# Allegro board test_fixture_3.brd

Outline 81.28 x 111.76 mm; copper layers: TOP, GROUND, MIDDLE, POWER, BOTTOM. Coordinates in mm from the lower left corner of the outline.
Outline path: rectangle 0,0 81.28,111.76

## Design rules (mm)
nets with their own width: min track width 0.178; nets V3_3 V5_5 VCC
nets with their own width: min track width 0.254; nets AGND

## Placement (name value [footprint] x y rotation side)
C1  0.1u  [CAP196]  67.31 94.61 0 top
C2  10u  [CAP196]  45.09 87.63 0 top
C3  0.1u  [CAP196]  25.4 92.46 0 top
C4  0.1u  [CAP196]  25.4 98.17 0 top
C5  0.1u  [CAP196]  38.73 87.63 0 top
C6  10u  [CAP196]  25.4 89.53 180 top
C7  0.1u  [CAP196]  32.38 87.63 0 top
C9  0.1u  [CAP196]  21.72 56.77 0 top
C10  0.1u  [CAP196]  28.19 56.77 0 top
C11  0.1u  [CAP196]  41.53 56.77 0 top
C12  0.1u  [CAP196]  34.8 56.77 0 top
C13  1n  [CAP196]  48.51 56.77 0 top
C14  0.1u  [CAP196]  62.36 56.77 0 top
C16  2u  [CAP196]  23.88 74.93 90 top
C17  0.1u  [CAP196]  55.5 56.77 0 top
C18  10u  [CAP196]  25.27 81.28 0 top
C22  0.47u  [CAP196]  67.82 85.34 0 top
C23  33u  [CAP196]  68.96 56.77 0 top
D1  LED  [CAP196]  12.32 73.66 0 top
D2  LED  [CAP196]  28.57 71.12 0 top
D3  LED  [CAP196]  34.8 70.48 0 top
J1  HEADER 32  [32_PINS_CIR_CONN_RIGHT_ANGLE]  74.93 19.68 90 top
J3  HEADER 32  [32_PINS_CIR_CONN_RIGHT_ANGLE]  16.51 19.05 90 top
J5  CON10A  [CONN10]  57.78 8.26 0 top
J6  CON2  [CAP196]  12.32 70.48 180 top
NOREF  -  [unnamed]  2.54 109.22 0 top
NOREF#2  -  [unnamed]  78.74 109.22 0 top
NOREF#3  -  [unnamed]  2.54 2.54 0 top
NOREF#4  -  [unnamed]  78.74 2.54 0 top
R1  100k  [RES400]  13.84 93.85 0 top
R2  1.26k  [RES400]  55.88 90.17 0 top
R3  100k  [RES400]  20.32 93.98 0 top
R4  22.17k  [RES400]  51.69 90.17 0 top
R5  11.1k  [RES400]  60.96 90.17 0 top
R6  1k  [RES400]  41.15 83.19 90 top
R7  1k  [RES400]  38.86 72.39 270 top
R8  10k  [RES400]  47.62 25.4 0 top
R9  10k  [RES400]  47.62 22.23 180 top
R10  10k  [RES400]  61.59 24.77 0 top
R11  10k  [RES400]  64.39 43.31 0 top
R12  1k  [RES400]  17.4 66.67 0 top
U1  LM124A  [DIP14_3]  31.11 93.73 90 top
U3  MAX3222  [DIP18_3]  40.39 53.21 270 top
U4  MC9S08QE128_64  [MC9S08QE128_V2]  11.43 30.48 0 top
U5  CAT24C02  [DIP8_3]  50.8 34.29 0 top
U6  max550acpa  [DIP8_3]  50.8 46.35 0 top
U7  LT323/TO220  [TO220AB]  18.03 81.28 270 top
U8  LM3940/TO220  [TO220AB]  51.44 85.72 90 top

## Library data of the parts
C1-C7 C14 C16-C18 C22 C23 = C: Tolerance: ***; User Part Number: ***
C9-C13 = CAP: Tolerance: ***; User Part Number: ***
D1-D3 = LED: Tolerance: ***; User Part Number: ***
J1 J3 = HEADER 32
J5 = CON10A: User Part Number: ***
J6 = CON2: Tolerance: ***; User Part Number: ***
R1-R7 R12 = R: Tolerance: ***; User Part Number: ***
R8-R11 = RESISTOR: Tolerance: ***; User Part Number: ***
U1 = LM124A: Tolerance: ***; User Part Number: ***
U3 = MAX3222_2: Tolerance: ***; User Part Number: ***
U4 = MC9S08QE128_11
U5 = CAT24C02_3: Tolerance: ***; User Part Number: ***
U6 = max550acpa_3: Tolerance: ***; User Part Number: ***
U7 = LT323/TO220_0
U8 = LM3940/TO220_0

## Footprints (pads in the part's own frame, mm; a bottom-side part is the same pattern mirrored in y, then rotated)
32_PINS_CIR_CONN_RIGHT_ANGLE
  round 1.016 hole 0.711: 1(4,6) 2(4,4) 3(6,6) 4(6,4) 5(8,6) 6(8,4) 7(10,6) 8(10,4) 9(12,6) 10(12,4) 11(14,6) 12(14,4) 13(16,6) 14(16,4) 15(18,6) 16(18,4) 17(20,6) 18(20,4) 19(22,6) 20(22,4) 21(24,6) 22(24,4) 23(26,6) 24(26,4) 25(28,6) 26(28,4) 27(30,6) 28(30,4) 29(32,6) 30(32,4) 31(34,6) 32(34,4)
CAP196
  round 1.524 hole 0.914: 1(0,0) 2(0,2.54)
CONN10
  round 1.524 hole 0.914: 1(0,0) 2(0,2.54) 3(2.54,0) 4(2.54,2.54) 5(5.08,0) 6(5.08,2.54) 7(7.62,0) 8(7.62,2.54) 9(10.16,0) 10(10.16,2.54)
DIP8_3
  rect 1.524x1.524 hole 0.914: 1(0,0)
  round 1.524 hole 0.914: 2(0,-2.54) 3(0,-5.08) 4(0,-7.62) 5(7.62,-7.62) 6(7.62,-5.08) 7(7.62,-2.54) 8(7.62,0)
DIP14_3
  rect 1.524x1.524 hole 0.914: 1(0,0)
  round 1.524 hole 0.914: 2(0,-2.54) 3(0,-5.08) 4(0,-7.62) 5(0,-10.16) 6(0,-12.7) 7(0,-15.24) 8(7.62,-15.24) 9(7.62,-12.7) 10(7.62,-10.16) 11(7.62,-7.62) 12(7.62,-5.08) 13(7.62,-2.54) 14(7.62,0)
DIP18_3
  rect 1.524x1.524 hole 0.914: 1(0,0)
  round 1.524 hole 0.914: 2(0,-2.54) 3(0,-5.08) 4(0,-7.62) 5(0,-10.16) 6(0,-12.7) 7(0,-15.24) 8(0,-17.78) 9(0,-20.32) 10(7.62,-20.32) 11(7.62,-17.78) 12(7.62,-15.24) 13(7.62,-12.7) 14(7.62,-10.16) 15(7.62,-7.62) 16(7.62,-5.08) 17(7.62,-2.54) 18(7.62,0)
MC9S08QE128_V2
  round 1.524 hole 1.067: 1(8.026,0) 2(10.033,0) 3(8.026,-2.007) 4(10.033,-2.007) 5(8.026,-4.013) 6(10.033,-4.013) 7(8.026,-6.02) 8(10.033,-6.02) 9(8.026,-8.026) 10(10.033,-8.026) 11(8.026,-10.033) 12(10.033,-10.033) 13(8.026,-12.04) 14(10.033,-12.04) 15(8.026,-14.046) 16(10.033,-14.046) 17(12.04,-20.066) 18(12.04,-18.059) 19(14.046,-20.066) 20(14.046,-18.059) 21(16.053,-20.066) 22(16.053,-18.059) 23(18.059,-20.066) 24(18.059,-18.059) 25(20.066,-20.066) 26(20.066,-18.059) 27(22.073,-20.066) 28(22.073,-18.059) 29(24.079,-20.066) 30(24.079,-18.059) 31(26.086,-20.066) 32(26.086,-18.059) 33(32.664,-14.046) 34(30.658,-14.046) 35(32.664,-12.04) 36(30.658,-12.04) 37(32.664,-10.033) 38(30.658,-10.033) 39(32.664,-8.026) 40(30.658,-8.026) 41(32.664,-6.02) 42(30.658,-6.02) 43(32.664,-4.013) 44(30.658,-4.013) 45(32.664,-2.007) 46(30.658,-2.007) 47(32.664,0) 48(30.658,0) 49(26.086,5.359) 50(26.086,3.353) 51(24.079,5.359) 52(24.079,3.353) 53(22.073,5.359) 54(22.073,3.353) 55(20.066,5.359) 56(20.066,3.353) 57(18.059,5.359) 58(18.059,3.353) 59(16.053,5.359) 60(16.053,3.353) 61(14.046,5.359) 62(14.046,3.353) 63(12.04,5.359) 64(12.04,3.353)
RES400
  round 1.651 hole 1.067: 1(0,0) 2(0,10.16)
TO220AB
  round 2.032 hole 1.397: 1(0,0) 2(-2.54,0) 3(-5.08,0)
unnamed
  round 0.635 hole 3.175 unplated: (0,0)

## Nets
AGND: C1.1 C3.1 C4.1 C11.2 C12.2 C13.2 C14.1 C16.1 C17.1 C18.1 C22.1 C23.1 D1.2(CATHODE) D2.2(CATHODE) D3.2(CATHODE) J1.9 J1.10 J1.11 J6.2 R3.1 U1.11(V-) U3.16 U4.9(VREFL) U4.10(VSSAD) U4.11(VSS_2) U5.1(A0) U5.2(A1) U5.3(A2) U6.1(GND) U7.2 U8.2
V3_3: C13.1 C14.2 C17.2 C23.2 J1.6 J1.7 J1.8 R7.2 R8.1 R9.1 R10.2 R11.2 U3.1(E\N\) U3.17(VCC) U3.18(S\H\D\N\) U4.6(VDD) U4.7(VDDAD) U4.8(VREFH) U4.40(VDD_2) U5.8 U6.8(VDD) U8.3(OUT)
V5_5: C1.2 C18.2 C22.2 R1.2 R6.2 U1.4(V+) U7.3(VOUT) U8.1(IN)
VCC: C16.2 J6.1 R12.2 U7.1(VIN)
VIN: C6.1 J3.32
VSS: U5.4
ADP9: J3.21 U4.37(PTA7/TPM2CH2/ADP9)
MISO2: J3.6 J5.5 U4.46(PTD2/KBI2P2/MISO2)
MOSI1: J3.28 U4.59(PTE1/MOSI1) U6.4(DIN)
MOSI2: J1.1 J5.1 U4.1(PTD1/KBI2P1/MOSI2)
OUTA: U6.2(OUTA)
PTE4: J3.18 U4.39(PTE4)
R1IN: U3.14(R1IN)
R1OUT: U3.13(R1OUT) U4.34(PTB0/KBI1P4/RXD1/ADP4)
R2IN: U3.9(R2IN)
R2OUT: U3.10(R2OUT) U4.52(PTC6/RXD2/ACMP2+)
RXD1: J3.2
RXD2: J3.13
SPSCK1: J3.29 U4.60(PTE0/TPM2CLK/SPSCK1) U6.5(SCLK)
SPSCK2: J1.2 J5.3 U4.2(PTD0/KBI2P0/SPSCK2)
SS1_N: U6.3(CS_N)
SS2_N: J3.10 J5.9 U4.45(PTD3/KBI2P3/S\S\2\)
T1OUT: U3.15(T1OUT)
T2OUT: U3.8(T2OUT)
TXD1: J3.1 U3.12(T1IN) U4.33(PTB1/KBI1P5/TXD1/ADP5)
TXD2: J3.12 U3.11(T2IN) U4.51(PTC7/TXD2/ACMP2-)
VOUT: C2.2 J3.11 U4.50(PTA0/KBI1P0/TPM1CH0/ADP0/ACMP1)
N05337: J1.4 R11.1 U4.4(PTH6/SCL2) U5.6(SCL)
N15041: C9.1 U3.2(C1+)
N15045: C9.2 U3.4(C1-)
N15127: C10.1 U3.5(C2+)
N15131: C10.2 U3.6(C2-)
N15240: C11.1 U3.3(V+)
N15268: C12.1 U3.7(V-)
N18999: C3.2 R1.1 R3.2 U1.2(-)
N19124: C4.2 R2.2 U1.1(OUT) U1.3(+) U1.5(+)
N19488: C5.1 C7.1 R2.1 R5.1
N19578: C5.2 R4.2 U1.6(-)
N19618: C2.1 C7.2 R4.1 U1.7(OUT)
N19633: C6.2 R5.2
N22932: J1.5 U4.5(PTE7/TPM3CLK)
N24595: J3.14 U4.53(PTE3/S\S\1\)
N24653: J1.31 U4.54(PTE2/MISO1)
N25786: J1.12 U4.12(PTB7/SCL1/EXTAL)
N25790: J1.13 U4.13(PTB6/SDA1/XTAL)
N49174: J3.3 U4.35(PTF3/ADP13)
N49178: J3.4 U4.36(PTF2/ADP12)
N49182: J3.5 U4.44(PTD4/KBI2P4)
N49186: J3.7 R8.2 U4.47(PTA3/KBI1P3/SCL1/ADP3)
N49190: J3.8 R9.2 U4.48(PTA2/KBI1P2/SDA11/ADP2)
N51133: J1.3 R10.1 U4.3(PTH7/SDA2) U5.5(SDA)
N52935: J3.9 U4.49(PTA1/KBI1P1/TPM2CH0/ADP1/ACMP1)
N55207: J3.15 U4.55(PTG3/ADP19)
N55211: J3.16 U4.63(PTA5/IRQ/TPM1CLK/R\E\S\E\T\\)
N55215: J3.17 U4.64(PTA4/ACMP1O/BKGD/MS)
N55219: J3.19 U4.28(PTF6/ADP16)
N55223: J3.20 U4.29(PTF5/ADP15)
N55410: J3.23 U4.42(PTF1/ADP11)
N55414: J3.24 U4.43(PTF0/ADP10)
N55418: J3.25 U4.30(PTF4/ADP14)
N55422: J3.26 U4.31(PTB3/KBI1P7/MOSI1/ADP7)
N55426: J3.27 U4.32(PTB2/KBI1P6/SPSCK1/ADP6)
N55430: J3.30 U4.62(PTC4/TPM3CH4/R\S\T\O\)
N55434: J3.31 U4.61(PTC5/TPM3CH5/ACMP2O)
N55502: J1.14 U4.14(PTH1)
N55506: J1.15 U4.15(PTH0)
N55510: J1.16 U4.16(PTE6)
N55514: J1.17 U4.17(PTE5)
N55518: J1.18 U4.18(PTB5/TPM1CH1/SS1\)
N55522: J1.19 U4.19(PTB4/TPM2CH1/MISO1)
N55526: J1.20 U4.20(PTC3/TPM3CH3)
N55530: J1.21 U4.21(PTC2/TPM3CH2)
N55534: J1.22 U4.22(PTD7/KBI2P7)
N55538: J1.23 U4.23(PTD6/KBI2P6)
N55542: J1.24 U4.24(PTD5/KBI2P5)
N55546: J1.25 U4.25(PTC1/TPM3CH1)
N55550: J1.26 U4.26(PTC0/TPM3CH0)
N55554: J1.27 U4.27(PTF7/ADP17)
N55558: J1.28 U4.56(PTG2/ADP18)
N55562: J1.29 U4.57(PTG1)
N55566: J1.30 U4.58(PTG0)
N55570: J1.32 U4.38(PTA6/TPM1CH2/ADP8)
N78033: D1.1(ANODE) R12.1
N78056: D3.1(ANODE) R7.1
N78319: D2.1(ANODE) R6.1
N117653: J3.22 U4.41(VSS)

Pads without a net: J5 2 4 6 7 8 10; U1 8 9 10 12 13 14; U5 7; U6 6 7

## Via types
v1: diameter 0.61, hole 0.33, TOP to BOTTOM, 99 vias

## Routing (per net, layer and track width the routed paths; a pad name or vN(x,y) marks a point on that pad's centre or on a via; arc(x,y) is an arc through that point)
V5_5: length 121.6
  GROUND w0.178: 66.94,87.88 C22.2 ; C22.2 68.69,87.88 ; C22.2 67.82,87.01 ; C22.2 67.82,88.76 ; U7.3 18.03,87.36 ; U7.3 17.03,86.36 ; U7.3 18.03,85.36 ; U7.3 19.04,86.36 ; 51.44,84.72 U8.1 ; U8.1 50.43,85.72 ; U8.1 52.44,85.72 ; U8.1 51.44,86.73 ; U1.4 38.73,94.6 ; U1.4 39.61,93.73 ; U1.4 38.73,92.85 ; U1.4 37.86,93.73 ; R6.2 30.99,84.06 ; R6.2 31.86,83.19 ; R6.2 30.11,83.19 ; R6.2 30.99,82.31 ; C1.2 68.19,97.16 ; C1.2 66.43,97.16 ; C1.2 67.31,98.03 ; C1.2 67.31,96.28 ; 24.4,83.82 C18.2 ; C18.2 26.15,83.82 ; C18.2 25.27,82.94 ; C18.2 25.27,84.7 ; R1.2 13.84,104.89 ; R1.2 13.84,103.14 ; R1.2 12.97,104.01 ; R1.2 14.72,104.01
  POWER w0.178: R1.2 13.84,95.15 12.93,94.23 12.93,93.47 13.84,92.56 13.84,90.55 U7.3 22.73,86.36 C18.2 29.44,83.82 30.07,83.19 R6.2 30.99,85.98 31.72,86.72 32.76,86.72 33.3,87.25 33.3,88.29 U1.4 39.98,93.73 40.9,92.81 41.65,92.81 42.24,93.39 42.85,93.39 43.44,92.81 44.35,92.81 U8.1 65.66,85.72 C22.2 68.46,88.53 68.46,96 C1.2
VCC: length 27.9
  POWER w0.178: J6.1 17.4,75.56 R12.2 ; J6.1 11.44,70.48 ; J6.1 12.32,69.61 ; J6.1 12.32,71.36 ; J6.1 13.2,70.48 ; 17.03,81.28 U7.1 ; U7.1 19.04,81.28 ; U7.1 18.03,82.28 ; U7.1 18.03,78.38 17.4,77.75 R12.2 ; 20.46,74.93 C16.2 ; C16.2 22.21,74.93 ; C16.2 21.34,75.81 ; C16.2 19.43,76.83 R12.2 ; C16.2 21.34,74.05
VIN: length 54.8
  TOP w0.127: v1(8.64,56.64) 8.64,77.47 9.27,78.11 12.7,78.11 13.72,79.12 13.72,88.77 14.48,89.53 C6.1
  BOTTOM w0.127: J3.32 12.51,55.05 11.94,55.63 9.65,55.63 v1(8.64,56.64)
ADP9: length 88.8
  TOP w0.127: U4.37 45.85,18.69 45.85,6.73 45.09,5.97 12.95,5.97 6.86,12.06 6.86,39.4 J3.21
MISO2: length 63.4
  TOP w0.127: J3.6 18.69,27.05 19.06,27.42 19.85,27.42 20.51,26.76 20.51,26.07 21.07,25.51 21.86,25.51 23.39,27.05 40.66,27.05 U4.46 42.76,27.8 42.76,27.72 43.14,27.34 43.14,26.07 43.7,25.51 44.97,25.51 47.24,23.24 48.77,23.24 59.37,12.64 59.37,10.4 59.93,9.84 61.28,9.84 J5.5
MOSI1: length 46.1
  TOP w0.127: U6.4 29.21,38.73 27.48,37.01 U4.59 23.63,39.69 23.1,39.69 22.54,40.25 22.54,40.96 20,43.5 19.11,43.5 13.56,49.05 J3.28
PTE4: length 92.6
  TOP w0.127: J3.18 11.5,39.05 10.8,38.35 9.52,38.35 7.11,35.94 7.11,12.19 12.83,6.48 44.7,6.48 45.47,7.24 45.47,13.46 44.45,14.48 41.91,14.48 40.64,15.75 40.64,17.33 40.75,17.45 40.75,17.86 40.64,17.97 40.64,20.57 41.47,21.4 43.04,21.4 U4.39
R1OUT: length 63.4
  TOP w0.127: v1(39.88,19.18) 36.7,19.18 33.78,22.1 22.45,22.1 21.86,21.5 19.06,21.5 18.5,22.06 18.5,22.26 v1(15.37,25.4)
  BOTTOM w0.127: U4.34 40.21,16.43 39.88,16.76 39.88,17.33 39.76,17.45 39.76,17.86 39.88,17.97 v1(39.88,19.18) ; v1(15.37,25.4) 15.37,25.9 15.38,25.91 15.38,35.74 15,36.12 15,36.59 18.54,40.13 21.46,40.13 24,42.67 29.08,42.67 31.11,40.64
R2OUT: length 40.9
  TOP w0.127: v1(46.74,40.13) 46.74,41.02 45.47,42.29 25.15,42.29 23.5,40.64
  BOTTOM w0.127: U4.52 36.46,34.79 37.91,34.79 38.86,33.83 42.09,33.83 46.74,38.48 v1(46.74,40.13)
SPSCK1: length 61.6
  TOP w0.127: U6.5 58.42,37.21 58.04,36.83 46.1,36.83 43.1,33.83 38.86,33.83 37.91,32.88 33.11,32.88 32.45,33.54 32.45,34.23 31.89,34.79 28.44,34.79 U4.60 26.43,34.89 25.08,34.89 24.52,35.44 24.52,37.2 13.37,48.35 12.22,48.35 11.81,48.76 11.81,49.91 11.17,50.56 11,50.56 J3.29
SPSCK2: length 107.1
  TOP w0.127: U4.2 v1(33.53,30.48) ; v1(47.75,9.78) 50.29,9.78 51.18,10.67 v1(51.18,18.03) ; J5.3 60.96,8.26 62.23,6.99 69.47,6.99 69.85,7.37 69.85,20.07 67.56,22.35 67.56,23.5 68.58,24.51 70.1,24.51 J1.2
  BOTTOM w0.127: v1(33.53,30.48) 34.29,29.72 34.29,20.83 45.34,9.78 v1(47.75,9.78) ; J1.2 70.93,24.45 70.61,24.77 67.82,24.77 67.06,24 67.06,22.86 65.79,21.59 54.1,21.59 51.18,18.67 v1(51.18,18.03)
SS2_N: length 74.4
  TOP w0.127: v1(38.61,23.37) 21.9,23.37 21.86,23.41 19.06,23.41 19.02,23.37 18.41,23.37 15.88,25.91 12.57,25.91 11.56,26.92 11.56,29.34 12.51,30.29 J3.10 ; J5.9 66.36,9.84 65.01,9.84 64.45,10.4 64.45,11.67 49.15,26.97 49.1,26.97 47.6,28.47 U4.45
  BOTTOM w0.127: U4.45 43.04,27.42 43.04,26.07 42.48,25.51 41.25,25.51 39.1,23.37 v1(38.61,23.37)
TXD1: length 84.4
  TOP w0.127: v1(45.59,41.15) 44.7,42.04 29.97,42.04 28.57,40.64 ; J3.1 10.51,24.06 11.21,24.76 11.21,29.88 11.81,30.48 11.81,31.34 12.22,31.75 13.08,31.75 14.35,33.02 15.24,33.02 v1(21.21,38.99)
  BOTTOM w0.127: v1(21.21,38.99) 26.92,38.99 28.57,40.64 ; v1(45.59,41.15) 47.12,41.15 47.75,40.51 47.75,37.97 42.02,32.25 42.02,32.18 41.73,31.89 41.67,31.89 39.62,29.84 39.62,25.65 37.72,23.75 37.72,18.03 40.39,15.37 43.03,15.37 U4.33
TXD2: length 31.4
  TOP w0.127: J3.12 13.49,33.05 14.74,34.3 14.94,34.3 15.23,34.59 15.23,34.79 v1(19.94,39.5) ; 26.04,40.64 27.23,40.64 28.18,39.69 28.97,39.69 29.68,40.4 30.01,40.4 30.72,39.69 31.51,39.69 32.22,40.4 32.55,40.4 33.26,39.69 34.99,39.69 v1(35.05,39.62)
  BOTTOM w0.127: U4.51 35.51,39.17 v1(35.05,39.62) ; v1(19.94,39.5) 24.89,39.5 26.04,40.64
VOUT: length 137.8
  TOP w0.127: C2.2 47.5,90.17 50.74,86.93 51.93,86.93 52.64,86.22 52.64,85.03 56.77,80.9 68.45,80.9 75.56,73.79 75.56,57.91 71.63,53.98 71.63,53.4 71.22,52.99 70.64,52.99 69.63,51.98 69.63,51.4 69.22,50.99 60.26,50.99 v1(54.1,44.83) ; v1(43.94,33.02) v1(40.01,33.02) ; J3.11 11.52,33.05 12.22,33.75 12.92,33.75 v1(15.49,36.32)
  BOTTOM w0.127: v1(40.01,33.02) 38.33,33.02 U4.50 36.07,32.38 21.97,32.38 18.03,36.32 v1(15.49,36.32) ; v1(54.1,44.83) 48.9,44.83 48.39,44.32 48.39,37.97 43.94,33.53 v1(43.94,33.02)
N05337: length 63.4
  TOP w0.127: U5.6 58.42,30.4 59.37,31.36 59.37,32.14 58.66,32.86 58.66,33.18 59.37,33.9 59.37,35.24 61.59,37.47 ; U5.6 67.4,29.21 68.23,28.38 68.23,27.4 68.64,26.99 69.63,26.99 J1.4 ; U5.6 52.15,29.21 51.19,28.26 50.41,28.26 49.45,29.21 46.27,29.21 45.93,28.87 45.51,28.87 45.41,28.97 45.01,28.97 44.77,29.21 44.71,29.21 44.49,29.43 43.7,29.43 43.48,29.21 42.7,29.21 42.48,29.43 41.69,29.43 41.48,29.21 22.2,29.21 U4.4
N18999: length 32.8
  TOP w0.127: C3.2 24.26,93.85 21.63,93.85 20.74,92.96 19.9,92.96 19.01,93.85 R1.1 ; C3.2 20.32,100.08 R3.2 ; C3.2 32.38,95 U1.2
N19124: length 45.9
  TOP w0.127: R2.2 54.23,101.98 49.53,101.98 U1.5 40.01,92.46 34.92,92.46 ; 34.92,92.46 32.38,92.46 U1.1 ; 34.92,92.46 U1.3 34.67,95.25 29.97,95.25 26.92,98.3 26.92,99.19 C4.2
N19488: length 33
  TOP w0.127: 56.6,89.45 60.24,89.45 R5.1 ; 56.6,89.45 R2.1 ; 56.6,89.45 56.6,87.33 v1(55.88,86.61) ; C7.1 C5.1
  BOTTOM w0.127: v1(55.88,86.61) 52.25,86.61 51.93,86.93 50.94,86.93 50.62,86.61 39.75,86.61 C5.1
N19578: length 17.7
  TOP w0.127: C5.2 40.26,90.17 U1.6 43.81,94.68 47.82,98.68 50.04,98.68 R4.2
N19618: length 35.1
  TOP w0.127: C7.2 30.61,88.39 30.61,86.23 31.24,85.6 44.2,85.6 45.09,86.49 C2.1 45.09,88.82 44.13,89.78 44.13,90.56 45.09,91.52 45.09,92.46 U1.7 49.91,90.17 R4.1
N19633: length 43.6
  TOP w0.127: R5.2 59.94,100.33 59.69,100.58 57.57,100.58 56.3,99.31 55.24,99.31 52.96,101.6 51.05,101.6 48.9,99.44 47.75,99.44 42.23,93.92 42.23,93.28 40.51,91.57 29.97,91.57 25.4,87
N22932: length 107.8
  BOTTOM w0.127: J1.5 70.23,26.38 73.57,26.38 75.31,24.64 75.31,8.26 72.39,5.33 17.53,5.33 15.37,7.49 15.37,17.02 16.76,18.41 16.76,25.53 17.7,26.47 U4.5
N24595: length 23.1
  TOP w0.127: v1(17.14,37.72) 15.18,37.72 J3.14
  BOTTOM w0.127: U4.53 31.62,37.72 27.12,37.72 27,37.83 26.59,37.83 26.48,37.72 22.29,37.72 22.18,37.6 21.77,37.6 21.65,37.72 v1(17.14,37.72)
N24653: length 51.9
  TOP w0.127: U4.54 34.47,34.8 38.1,34.8 38.35,34.54 43.31,34.54 46.1,37.34 52.2,37.34 52.7,37.85 52.7,49.91 57.66,54.86 67.75,54.86 J1.31
N25786: length 93.7
  TOP w0.127: U4.12 20.51,19.49 18.99,19.49 v1(16.26,16.76)
  BOTTOM w0.127: J1.12 70.01,32.77 67.18,32.77 66.67,32.26 66.67,22.99 65.66,21.97 52.83,21.97 50.16,19.3 50.16,9.91 45.97,5.71 18.41,5.71 16.26,7.87 v1(16.26,16.76)
N25790: length 76.6
  TOP w0.127: v1(37.34,17.02) 35.92,18.44 35.27,18.44 35.26,18.43 34.85,18.43 34.83,18.44 22.81,18.44 21.86,17.49 20.41,17.49 U4.13
  BOTTOM w0.127: v1(37.34,17.02) 45.34,9.02 48.77,9.02 49.72,9.97 49.72,19.49 52.58,22.35 65.53,22.35 66.42,23.24 66.42,33.15 67.56,34.29 67.56,34.32 J1.13
N49174: length 64.5
  TOP w0.127: v1(44.83,13.08) 44.83,7.49 44.2,6.86 13.59,6.86 9.02,11.43 9.02,24.64 9.43,25.05 J3.3
  BOTTOM w0.127: v1(44.83,13.08) 44.83,14.73 45.34,15.24 45.34,17.2 U4.35
N49178: length 40.5
  TOP w0.127: v1(40.26,17.65) 39.24,17.65 36.7,15.11 15.24,15.11 14.86,15.49 14.86,17.02 16.26,18.41 16.26,20.29 12.51,24.04 J3.4
  BOTTOM w0.127: U4.36 41.3,17.65 v1(40.26,17.65)
N49182: length 56.8
  TOP w0.127: v1(24.26,22.73) 34.54,22.73 35.18,22.1 39.88,22.1 40.26,22.48 40.26,25.59 41.14,26.47 U4.44 ; v1(17.14,14.48) v1(10.54,14.48)
  BOTTOM w0.127: J3.5 8.76,25.3 8.76,14.99 9.27,14.48 v1(10.54,14.48) ; v1(24.26,22.73) 23.37,21.84 23.37,16.38 21.46,14.48 v1(17.14,14.48)
N49186: length 50.8
  TOP w0.127: v1(47.62,30.48) U4.47 ; R8.2 v1(47.62,33.15) ; v1(32.26,29.72) v1(40.51,29.72)
  BOTTOM w0.127: v1(32.26,29.72) 22.1,29.72 21.81,29.43 21.07,29.43 20.73,29.08 20.19,29.08 19.85,29.43 19.06,29.43 18.72,29.08 17.14,29.08 16.38,28.32 16.38,24.89 15.62,24.13 15.24,24.13 14.1,25.27 14.1,27.81 13.56,28.35 12.22,28.35 11.52,29.05 J3.7 ; v1(47.62,33.15) v1(47.62,30.48) ; v1(40.51,29.72) 41.5,29.72 41.69,29.53 42.48,29.53 42.67,29.72 43.33,29.72 U4.47
N49190: length 55.4
  TOP w0.127: J3.8 15.08,29.05 v1(15.88,29.84) ; v1(38.35,31.11) 38.99,30.48 U4.48
  BOTTOM w0.127: v1(15.88,29.84) 16.64,29.84 18.41,31.62 37.85,31.62 v1(38.35,31.11) ; 47.62,12.06 47.62,20.79 46.61,21.8 46.61,30.48 45.47,31.62 43.23,31.62 U4.48
N51133: length 70.2
  TOP w0.127: v1(21.97,38.1) 21.21,37.34 20.32,37.34 17.53,34.54 17.53,30.4 U4.3 ; v1(34.16,37.59) 45.34,37.59 45.85,38.1 v1(49.02,38.1) ; J1.3 64.04,25.69 63.96,25.77 63.55,25.77 63.47,25.69 63.4,25.69 63.37,25.65 62.48,25.65 R10.1 59.69,26.67 U5.5
  BOTTOM w0.127: v1(21.97,38.1) 33.66,38.1 v1(34.16,37.59) ; v1(49.02,38.1) 50.94,36.18 50.94,36.12 51.23,35.83 51.3,35.83 52.96,34.16 52.96,32.7 53.07,32.59 53.07,32.18 52.96,32.07 52.96,27.43 53.72,26.67 U5.5
N55211: length 17
  TOP w0.127: U4.63 24.42,34.89 24.42,33.06 24.13,32.77 22.86,32.77 21.72,33.91 v1(18.41,33.91)
  MIDDLE w0.127: v1(14.73,34.8) 17.53,34.8 v1(18.41,33.91)
  BOTTOM w0.127: v1(14.73,34.8) 14.73,34.83 J3.16
N55215: length 16.3
  TOP w0.127: J3.17 11.46,40.01 16.64,40.01 v1(18.16,38.48) ; U4.64 22.12,35.18 20.83,35.18 v1(20.19,35.81)
  MIDDLE w0.127: v1(20.19,35.81) 18.16,37.85 v1(18.16,38.48)
N55219: length 42.4
  TOP w0.127: v1(27.18,17.4) 27.69,17.4 v1(29.08,16) ; J3.19 11.52,41.05 12.22,40.35 12.8,40.35 13.5,41.05 14.96,41.05 v1(15.37,40.64)
  MIDDLE w0.127: v1(27.18,17.4) 27.18,26.29 15.37,38.1 v1(15.37,40.64) ; v1(32,14.35) 32.35,14 32.35,13.57 U4.28
  BOTTOM w0.127: v1(32,14.35) 30.35,16 v1(29.08,16)
N55223: length 59.7
  MIDDLE w0.127: U4.29 34.49,11.43 27.3,11.43 27.18,11.3 27.11,11.3 26.37,10.55 26.37,10.05 25.72,9.4 14.35,9.4 8.64,15.11 8.64,39.5 9.14,40.01 11.46,40.01 J3.20
N55410: length 54
  TOP w0.127: v1(25.02,24.51) 31.62,24.51 32.26,25.15 38.61,25.15 v1(39.37,24.38)
  MIDDLE w0.127: v1(25.02,24.51) 23.75,23.24 21.93,23.24 21.83,23.34 19.09,23.34 18.99,23.24 v1(15.49,23.24) ; U4.42 41.2,24.46 41.12,24.38 v1(39.37,24.38)
  BOTTOM w0.127: J3.23 9.4,43.94 9.4,28.45 10.1,27.75 10.8,27.75 11.21,27.34 11.21,26.64 12.1,25.75 12.8,25.75 13.21,25.34 13.21,24.64 14.61,23.24 v1(15.49,23.24)
N55414: length 46.5
  MIDDLE w0.127: J3.24 21.59,35.97 21.59,33.15 v1(26.42,28.32) ; v1(28.45,28.32) 29.34,27.43 36.07,27.43 37.48,28.84 41.2,28.84 41.72,29.36 v1(45.72,29.36)
  BOTTOM w0.127: v1(45.72,29.36) 45.72,28.09 U4.43 ; v1(26.42,28.32) v1(28.45,28.32)
N55418: length 75.6
  MIDDLE w0.127: v1(26.92,8) 13.97,8 7.75,14.22 7.75,44.29 J3.25
  BOTTOM w0.127: v1(26.92,8) 37.08,8 38.73,9.65 38.73,13.08 38.23,13.59 36.68,13.59 U4.30
N55422: length 67.5
  MIDDLE w0.127: v1(17.14,8.76) 14.48,8.76 8.26,14.99 8.26,42.8 9.4,43.94 9.4,43.94 9.89,44.43 10.77,44.43 11.13,44.79 11.13,45.67 J3.26
  BOTTOM w0.127: v1(17.14,8.76) 36.96,8.76 37.52,9.32 U4.31
N55426: length 76.8
  MIDDLE w0.127: J3.27 7.11,45.65 7.11,13.97 13.72,7.37 v1(25.65,7.37) ; U4.32 38.4,12.42 39.56,11.27 v1(39.56,10.41)
  BOTTOM w0.127: v1(25.65,7.37) 37.36,7.37 39.56,9.57 v1(39.56,10.41)
N55430: length 24.2
  MIDDLE w0.127: U4.62 26.54,34.9 26.54,36.32 24.89,37.97 24.26,37.97 14.48,47.75 14.48,49.7 13.13,51.05 J3.30
N55434: length 27.1
  TOP w0.127: v1(15.62,43.43) 15.62,44.83 15.37,45.09 13.46,45.09 13.21,45.34 12.8,45.75 12.8,45.75 12.22,46.33 12.22,46.35 9.53,49.05 9.53,52.07 J3.31
  MIDDLE w0.127: v1(15.62,43.43) 15.62,42.67 21.56,36.73 24.59,36.73 U4.61
N55502: length 76
  TOP w0.127: v1(35.05,18.92) 34.54,19.43 22.45,19.43 U4.14
  MIDDLE w0.127: v1(41.78,10.92) 50.42,10.92 59.05,19.56 71.88,19.56 72.9,20.57 72.9,33.72 J1.14
  BOTTOM w0.127: v1(35.05,18.92) 35.05,17.65 v1(41.78,10.92)
N55506: length 65.8
  TOP w0.127: v1(31.5,17.14) 29.72,15.37 27.55,15.37 27.29,15.62 v1(26.8,15.62) ; v1(62.48,31.24) 62.83,31.59 62.84,31.59 J1.15
  MIDDLE w0.127: v1(31.5,17.14) 31.88,17.53 31.88,18.16 39.07,25.35 44.46,25.35 44.54,25.27 46.49,25.27 47.26,24.51 55.5,24.51 55.88,24.89 59.05,24.89 v1(59.56,25.4) ; v1(26.8,15.62) 26.29,15.11 26.29,13.84 25.78,13.34 20.45,13.34 19.46,14.33 U4.15
  BOTTOM w0.127: v1(62.48,31.24) 62.48,28.32 v1(59.56,25.4)
N55510: length 68.3
  MIDDLE w0.127: v1(26.04,16.89) 23.11,16.89 22.66,16.43 U4.16 ; v1(32.89,16.43) 37.16,16.43 38.73,14.86 48.64,14.86 48.77,14.99 48.77,19.68 52.83,23.75 65.15,23.75 65.91,24.51 65.91,34.04 68.58,36.7 69.95,36.7 J1.16
  BOTTOM w0.127: v1(32.89,16.43) 29.35,16.43 29.29,16.5 28.88,16.5 28.81,16.43 26.49,16.43 v1(26.04,16.89)
N55514: length 80.9
  TOP w0.127: U4.17 22.48,10.41 21.97,10.92 21.97,13.97 v1(22.61,14.61) ; v1(34.16,17.78) 33.81,18.13 25.5,18.13 24.64,17.27 v1(24.64,15.88)
  MIDDLE w0.127: v1(50.29,22.73) 47.75,20.19 47.24,20.19 44.6,17.55 43.73,17.55 43.37,17.91 42.81,17.91 42.46,17.55 41.72,17.55 41.36,17.91 40.71,17.91 40.46,18.15 40.05,18.15 39.69,17.78 v1(34.16,17.78) ; v1(24.64,15.88) 23.88,15.88 v1(22.61,14.61)
  BOTTOM w0.127: J1.17 69.85,40.61 69.85,42.16 69.47,42.55 68.83,42.55 68.67,42.38 68.64,42.38 67.56,41.31 67.56,38.86 64.52,35.81 64.52,34.16 65.53,33.15 65.53,23.75 65.02,23.24 60.45,23.24 58.55,25.15 52.7,25.15 v1(50.29,22.73)
N55518: length 68.6
  TOP w0.127: U4.18 23.47,14.07 v1(24,14.61) ; v1(36.83,26.16) v1(32,26.16) ; v1(24.64,21.34) v1(32,21.34)
  MIDDLE w0.127: v1(37.47,27.94) 41.02,27.94 41.4,27.56 58.55,27.56 59.56,28.57 59.56,31.11 64.39,35.94 65.66,35.94 68.33,38.61 69.85,38.61 J1.18
  BOTTOM w0.127: v1(32,21.34) v1(32,26.16) ; v1(36.83,26.16) 36.83,27.3 v1(37.47,27.94) ; v1(24,14.61) 24,20.7 v1(24.64,21.34)
N55522: length 62.6
  TOP w0.127: v1(29.34,14.22) 27.81,14.22 26.43,12.84 26.43,11.37 U4.19
  MIDDLE w0.127: v1(65.28,35.18) 64.26,35.18 60.45,31.37 60.45,25.15 59.56,24.26 45.85,24.26 44.93,23.34 41.72,23.34 40.86,22.48 37.59,22.48 v1(29.34,14.22)
  BOTTOM w0.127: J1.19 67.94,40.7 67.94,37.85 v1(65.28,35.18)
N55526: length 65.9
  TOP w0.127: v1(33.4,28.19) v1(34.92,28.19) ; U4.20 v1(25.48,14.17)
  MIDDLE w0.127: J1.20 69.55,40.31 69.55,39.43 69.19,39.06 68.31,39.06 65.57,36.32 58.93,36.32 56.52,33.91 53.34,33.91 52.32,32.89 49.78,32.89 48.26,31.37 38.8,31.37 38.56,31.61 37.83,31.61 36.93,30.7 36.16,30.7 v1(35.81,30.35)
  BOTTOM w0.127: v1(35.81,30.35) 34.92,29.46 v1(34.92,28.19) ; v1(33.4,28.19) 29.84,28.19 25.27,23.62 25.27,14.87 25.48,14.67 v1(25.48,14.17)
N55530: length 92.8
  MIDDLE w0.127: J1.21 69.82,44.58 71.5,44.58 75.31,40.77 75.31,8.26 72.77,5.71 71.95,5.71 71.83,5.6 71.42,5.6 71.31,5.71 30.35,5.71 27.48,8.59 U4.21
N55534: length 69.1
  MIDDLE w0.127: U4.22 27.48,13.31 27.67,13.5 27.67,30.21 28.57,31.11 36.96,31.11 45.09,39.24 50.05,39.24 50.43,39.62 51.17,39.62 51.55,39.24 57.67,39.24 58.05,39.62 58.79,39.62 60.69,37.72 65.79,37.72 69.13,41.06 69.19,41.06 69.55,41.43 69.55,42.31 J1.22
N55538: length 90.3
  MIDDLE w0.127: J1.23 68.31,45.06 68.31,43.43 68.5,43.23 68.5,43.23 68.67,43.06 69.19,43.06 70.22,44.1 70.46,44.1 70.67,44.31 71.19,44.31 71.55,43.94 71.55,43 73.79,40.77 73.79,9.14 71.12,6.48 31.75,6.48 29.49,8.74 U4.23
N55542: length 90.7
  TOP w0.127: v1(43.69,7.49) 29.46,7.49 28.54,8.42 28.54,11.47 U4.24 ; J1.24 74.53,42.09 v1(74.53,21.59) ; v1(46.74,7.49) 47.75,7.49 49.15,6.1 v1(71.63,6.1)
  BOTTOM w0.127: v1(74.53,21.59) 74.53,9 v1(71.63,6.1) ; v1(43.69,7.49) v1(46.74,7.49)
N55546: length 76
  TOP w0.127: v1(67.31,45.97) 67.31,41.91 65.41,40.01 62.23,40.01 56.39,34.16 54.36,34.16 v1(52.58,32.38) ; v1(49.4,23.5) 49.75,23.85 51.05,23.85 52.7,22.19 v1(52.7,21.08) ; U4.25 32.45,11.37 32.45,13.27 33.78,14.61 38.86,14.61 41.47,12 v1(44.26,12) ; v1(51.31,19.68) 50.67,19.05 50.67,11.56 49.53,10.41 v1(49.02,10.41)
  BOTTOM w0.127: v1(49.4,23.5) 49.75,23.85 50.39,23.85 52.58,26.04 v1(52.58,32.38) ; v1(67.31,45.97) 67.31,46.76 68.23,47.69 J1.25 ; v1(49.02,10.41) 46.74,10.41 45.15,12 v1(44.26,12) ; v1(51.31,19.68) v1(52.7,21.08)
N55550: length 9.7
  TOP w0.127: 66.29,40.39 67.56,41.66 67.56,42.16 68.39,42.99 69.22,42.99 69.63,43.4 69.63,44.23 70.23,44.83 70.23,45.98 70.93,46.67 J1.26
N55554: length 66.8
  TOP w0.127: J1.27 64.33,45.09 57.53,45.09 53.09,40.64 v1(53.09,37.34) ; v1(35.56,24.38) v1(33.4,24.38) ; v1(51.44,36.32) 50.29,36.32 48.9,34.92 48.9,33.02 48.39,32.51 44.83,32.51 44.7,32.38 v1(41.53,32.38)
  BOTTOM w0.127: v1(33.4,24.38) 33.4,13.67 32.55,12.82 32.55,11.37 U4.27 ; v1(41.53,32.38) 39.37,30.23 37.08,30.23 35.56,28.7 v1(35.56,24.38) ; v1(51.44,36.32) 52.83,36.32 53.09,36.58 v1(53.09,37.34)
N55558: length 52.1
  TOP w0.127: J1.28 69.63,48.38 69.63,47.4 69.22,46.99 67.43,46.99 66.8,46.35 66.8,41.91 65.15,40.26 61.98,40.26 57.78,36.07 51.88,36.07 51.64,35.83 51.23,35.83 50.99,36.07 50.42,36.07 49.15,34.8 49.15,32.89 48.39,32.13 41.98,32.13 41.73,31.89 41.32,31.89 41.08,32.13 33.2,32.13 U4.56
N55566: length 61.4
  TOP w0.127: v1(41.78,43.43) 46.61,43.43 47.5,42.55 v1(49.02,42.55) ; J1.30 69.63,50.38 69.63,49.4 69.22,48.99 68.8,48.99 66.17,46.35 66.17,41.78 65.02,40.64 61.85,40.64 61.21,40.01 v1(54.23,40.01) ; v1(40.26,37.08) v1(30.61,37.08)
  BOTTOM w0.127: v1(49.02,42.55) 52.2,42.55 54.23,40.51 v1(54.23,40.01) ; U4.58 28.54,34.79 28.54,36.66 28.96,37.08 v1(30.61,37.08) ; v1(41.78,43.43) 41.15,43.43 40.26,42.55 v1(40.26,37.08)
N55570: length 61.1
  TOP w0.127: U4.38 42.76,21.12 43.42,21.12 43.7,21.4 44.77,21.4 46.04,20.13 v1(48.45,20.13)
  BOTTOM w0.127: v1(48.45,20.13) 52.45,24.13 54.23,24.13 55.63,22.73 65.28,22.73 66.17,23.62 66.17,33.53 68.23,35.59 68.23,35.98 68.64,36.38 69.02,36.38 70.23,37.59 70.23,37.98 70.64,38.38 71.02,38.38 72.14,39.5 72.14,52.48 J1.32
N78033: length 10
  TOP w0.127: R12.1 15.75,68.33 15.75,71.75 13.84,73.66 D1.1
N78056: length 4.9
  TOP w0.127: R7.1 36.96,70.48 D3.1
N78319: length 19.6
  TOP w0.127: D2.1 30.86,71.12 30.99,71.25 30.99,74.68 39.5,83.19 R6.1

## Copper pours and planes (outline as drawn; the poured copper is in the pictures)
V5_5 on GROUND: 5.84,106.17 5.84,85.09 17.4,85.09 17.4,84.84 22.48,84.84 22.48,78.49 47.5,78.49 47.5,84.2 59.44,84.2 59.44,81.66 74.42,81.66 74.42,106.17
VCC on POWER: 8.89,82.42 8.89,65.91 15.11,65.91 15.11,65.15 43.05,65.15 43.05,77.98 21.59,77.98 21.59,82.42
VCC on POWER: 74.55,80.64 74.55,6.22 6.1,6.22 6.1,64.14 44.32,64.14 44.32,76.2 49.02,76.2 49.02,82.17 58.93,82.17 58.93,80.64
